# EAGLE board Qwiic_4_Pin_Fan_Controller (EAGLE 9.5.2)
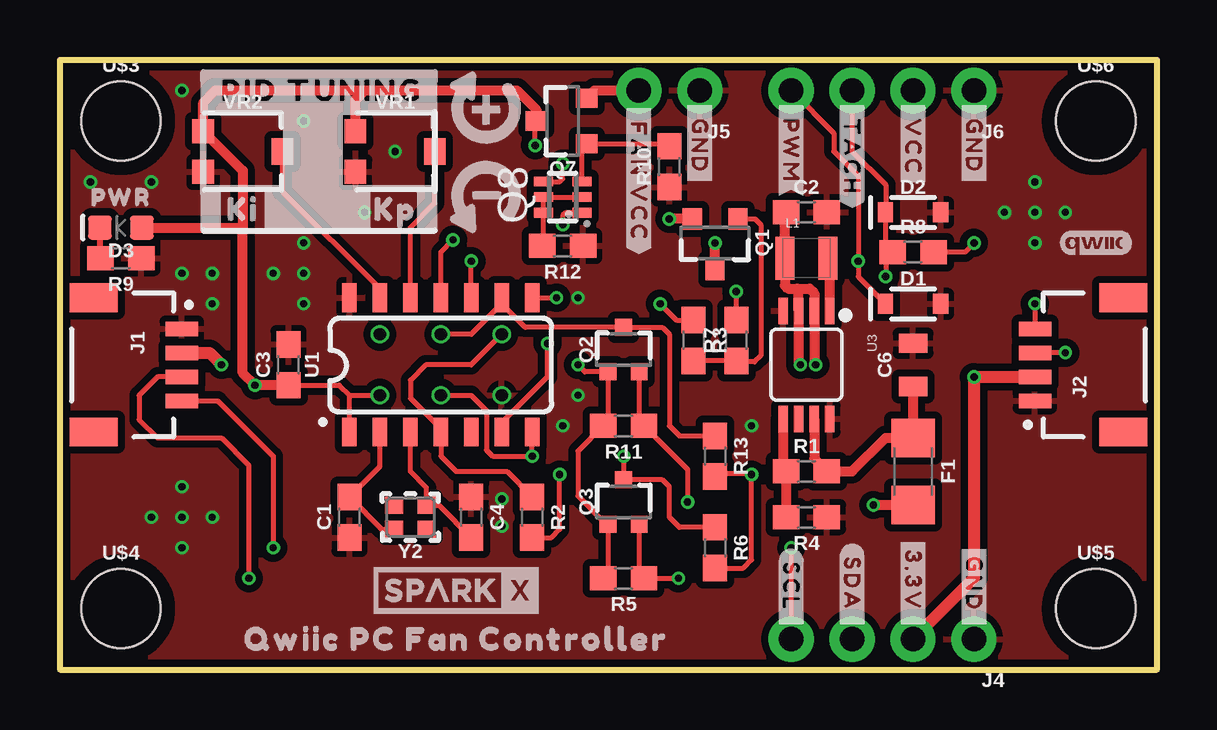
[diagram p0: board, top side]
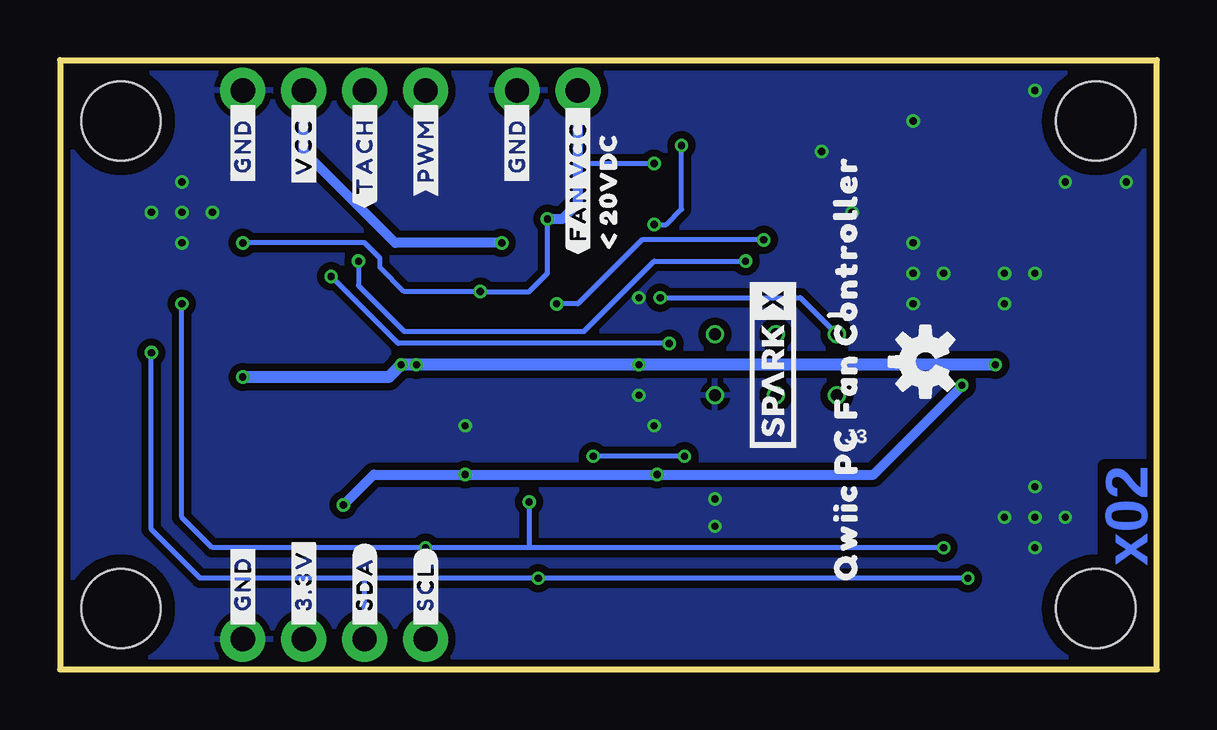
[diagram p1: board, bottom side, seen from below]

Size 45.72 x 25.4 mm. Coordinates in mm from the lower left corner, seen from the top.
Outline: 0,0 45.72,0 45.72,25.4 0,25.4 0,0
Copper layers (1*16): Top 0.035mm / dielectric 1.5mm / Bottom 0.035mm
Design rules "SparkFun-2-Layer-Minimum-JLCPCB": minimum track width 5mil, minimum drill 0.3mm, track to track 5mil, track to pad 5mil, pad to pad 5mil, via to via 5mil, smd to smd 5mil, copper to edge 7mil, drill to drill 7mil, minimum pad ring 5mil, minimum via ring 5mil, stop-mask expansion 4mil, vias tented up to drill 25mil, thermal gap 10mil
Net classes: 1 power: width 0.203 mm

## Footprints (pad centres in the part's own frame; a part is rotated, then mirrored left to right if it is on the bottom)
0603 = smd 1.1 x 1: 1 -0.85,0; 2 0.85,0
0805 = smd 0.8 x 1.2: 1 -0.9,0; 2 0.9,0
SOD-323 = smd 0.63 x 0.83: A 1.15,0; C -1.15,0
LED-0603 = smd 1 x 1: A -0.877,0; C 0.877,0
1206 = smd 1.6 x 1.8: 1 -1.4,0; 2 1.4,0
JST04_1MM_RA = smd 0.6 x 1.35: 1 -1.5,0; 2 -0.5,0; 3 0.5,0; 4 1.5,0 | smd 1.2 x 2: NC1 2.8,-3.675; NC2 -2.8,-3.675
2X3_TEST_POINTS = drill 0.508: 1 -2.54,-1.27; 2 -2.54,1.27; 3 0,-1.27; 4 0,1.27; 5 2.54,-1.27; 6 2.54,1.27
1X04_NO_SILK = drill 1.016 pad 1.88: 1 0,0; 2 2.54,0; 3 5.08,0; 4 7.62,0
1X02_NO_SILK = drill 1.016 pad 1.88: 1 0,0; 2 2.54,0
0806 = smd 0.8 x 1.8: 1 -0.9,0; 2 0.9,0
SOT23-3 = smd 0.8 x 0.9: 1 -0.95,-1; 2 0.95,-1; 3 0,1.1
SOT323 = smd 0.7 x 0.7: 1 -0.65,-0.925; 2 0.65,-0.925; 3 0,0.925
SOT363_PHILIPS = smd 0.4 x 0.8: 1 -0.65,-0.8; 2 0,-0.8; 3 0.65,-0.8; 4 0.65,0.8; 5 0,0.8; 6 -0.65,0.8
0603@1 = smd 1.1 x 1: 1 -0.85,0; 2 0.85,0
SO14 = smd 0.6 x 1.2: 1 -3.81,-2.8; 2 -2.54,-2.8; 3 -1.27,-2.8; 4 0,-2.8; 5 1.27,-2.8; 6 2.54,-2.8; 7 3.81,-2.8; 8 3.81,2.8; 9 2.54,2.8; 10 1.27,2.8; 11 0,2.8; 12 -1.27,2.8; 13 -2.54,2.8; 14 -3.81,2.8
MSOP8 = smd 0.4 x 1.1: 1 -0.975,-2.25; 2 -0.325,-2.25; 3 0.325,-2.25; 4 0.975,-2.25; 5 0.975,2.25; 6 0.325,2.25; 7 -0.325,2.25; 8 -0.975,2.25
STAND-OFF = hole 3.302: 0,0
TRIMPOT-SMD-3MM-CLOSED = smd 1 x 0.9: 1 -0.85,-1.65; 3 0.85,-1.65 | smd 1.1 x 0.9: 2 0,1.65
CRYSTAL-SMD-2.0X1.6MM = smd 0.75 x 0.7: 1 -0.675,-0.5; 2 0.675,-0.5; 3 0.675,0.5; 4 -0.675,0.5

## Placement (x,y rotation side)
C1  22pF  [0603]  12.06,6.35 90 top
C2  10uF  [0603]  31.11,19.05 0 top
C3  0.1uF  [0603]  9.53,12.7 90 top
C4  22pF  [0603]  17.14,6.35 270 top
C6  22uF  [0805]  35.56,12.7 90 top
D1  3.6V  [SOD-323]  35.56,15.24 0 top
D2  3.6V  [SOD-323]  35.56,19.05 0 top
D3  RED  [LED-0603]  2.54,18.41 180 top
F1  6V/0.75A  [1206]  35.56,8.26 270 top
FRAME1  FRAME-LETTER  [CREATIVE_COMMONS]  -1.27,-11.43 0 top  (outside the outline)
J1  QWIIC_RIGHT_ANGLE  [JST04_1MM_RA]  5.08,12.7 270 top
J2  QWIIC_RIGHT_ANGLE  [JST04_1MM_RA]  40.64,12.7 90 top
J3  AVR_SPI_PROG_3X2TESTPOINTS  [2X3_TEST_POINTS]  15.88,12.7 180 bottom
J4  [1X04_NO_SILK]  38.1,1.27 180 top
J5  [1X02_NO_SILK]  26.67,24.13 180 top
J6  [1X04_NO_SILK]  38.1,24.13 180 top
L1  2.2μH  [0806]  31.11,17.14 0 top
Q1  20V/4.2A/52mΩ/1.4W  [SOT23-3]  27.3,17.78 180 top
Q2  310mA/60V/1.6Ω  [SOT323]  23.5,13.34 0 top
Q3  310mA/60V/1.6Ω  [SOT323]  23.5,6.99 0 top
Q7  20V/4.2A/52mΩ/1.4W  [SOT23-3]  20.95,22.86 90 top
Q8  [SOT363_PHILIPS]  20.95,19.68 90 top
R1  750K  [0603]  31.11,8.26 0 top
R2  10k  [0603@1]  19.68,6.35 270 top
R3  1k  [0603]  26.42,13.72 270 top
R4  100k  [0603]  31.11,6.35 180 top
R5  2.2k  [0603]  23.5,3.81 180 top
R6  2.2k  [0603]  27.3,5.08 270 top
R7  10k  [0603@1]  28.19,13.72 90 top
R8  10k  [0603@1]  35.56,17.4 0 top
R9  1k  [0603]  2.54,17.14 180 top
R10  47k  [0603@1]  25.4,20.95 90 top
R11  2.2k  [0603]  23.5,10.16 180 top
R12  10k  [0603@1]  20.95,17.65 180 top
R13  2.2k  [0603]  27.3,8.89 270 top
U1  ATtiny841  [SO14]  15.88,12.7 0 top
U3  PAM2401  [MSOP8]  31.11,12.7 180 top
U$1  [#_GND#0]  38.1,23.75 270 top
U$2  [#_VCC#0]  35.56,23.75 270 top
U$3  [STAND-OFF]  2.54,22.86 0 top
U$4  [STAND-OFF]  2.54,2.54 0 top
U$5  [STAND-OFF]  43.18,2.54 0 top
U$6  [STAND-OFF]  43.18,22.86 0 top
U$7  [#_TACH#0]  33.02,23.75 270 top
U$8  [#_PWM#0]  30.48,23.75 270 top
U$9  [#_GND#0]  26.67,23.75 270 top
U$10  [#GND_#0]  38.1,1.65 270 top
U$11  [#3#3V_#0]  35.56,1.65 270 top
U$12  [#SDA_#0]  33.02,1.65 270 top
U$13  [#SCL_#0]  30.48,1.65 270 top
U$14  [#PID_TUNING0]  10.92,24.13 0 top
U$15  [KI0]  7.62,19.18 0 top
U$16  [KP0]  13.97,19.18 0 top
U$17  [QWIIC_3MM]  43.18,17.78 0 top
U$18  [SPARKX-SMALL]  16.51,3.3 0 top
U$19  [#_FAN_VCC#0]  24.13,23.62 270 top
U$20  [#GND_#0]  38.1,23.75 90 bottom
U$21  [#_GND#0]  38.1,1.65 90 bottom
U$22  [PWR0]  2.54,19.68 0 top
U$23  [#VCC_#0]  35.56,23.75 90 bottom
U$24  [#TACH_#0]  33.02,23.75 90 bottom
U$25  [#PWM_#0]  30.48,23.75 90 bottom
U$26  [#GND_#0]  26.67,23.75 90 bottom
U$27  [#_3#3V#0]  35.56,1.65 90 bottom
U$28  [#_SDA#0]  33.02,1.65 90 bottom
U$29  [#_SCL#0]  30.48,1.65 90 bottom
U$30  [QWIIC_PC_FAN_CONTROLLER0]  16.51,1.27 0 top
U$31  [#FAN_VCC_#0]  24.13,23.62 90 bottom
U$32  [_#_20VDC0]  22.86,22.86 90 bottom
U$35  [QWIIC_PC_FAN_CONTROLLER0]  12.95,12.57 90 bottom
U$36  [SPARKX-SMALL]  16,12.7 90 bottom
U$37  [OSHW-LOGO-S]  9.65,12.83 90 bottom
U$38  [TURN_INDICATOR#SVG0]  16.13,25.02 0 top
VR1  10k  [TRIMPOT-SMD-3MM-CLOSED]  13.97,21.59 270 top
VR2  10k  [TRIMPOT-SMD-3MM-CLOSED]  7.62,21.59 270 top
Y2  16MHz  [CRYSTAL-SMD-2.0X1.6MM]  14.61,6.35 180 top

## Library data of the parts
C1 C4 = SparkFun-Capacitors; PROD_ID: CAP-07876
C2 = SparkFun-Capacitors; PROD_ID: CAP-11015
C3 = SparkFun-Capacitors; PROD_ID: CAP-00810
C6 = SparkFun-Capacitors; PROD_ID: CAP-08402
D1 D2 = SparkFun-DiscreteSemi; PROD_ID: DIO-08199
D3 = SparkFun-LED; PROD_ID: DIO-00819
F1 = SparkFun-Fuses; PROD_ID: RES-11150
FRAME1 U$17 U$37 = SparkFun-Aesthetics
J1 J2 = SparkFun-Connectors; PROD_ID: CONN-13694
J3-J5 = SparkFun-Connectors
J6 = SparkFun-Connectors; PROD_ID: CONN-09696
L1 = SparkFun-Coils; PROD_ID: NDUC-14257
Q1 Q7 = SparkFun-DiscreteSemi; PROD_ID: TRAN-14388
Q2 Q3 = SparkFun-DiscreteSemi; PROD_ID: TRANS-11151
Q8 = SparkFun-DiscreteSemi; PROD_ID: TRAN-14386
R1 = SparkFun-Resistors; PROD_ID: RES-13768
R2 R7 R8 R12 = SparkFun-Resistors; PROD_ID: RES-00824
R3 R9 = SparkFun-Resistors; PROD_ID: RES-07856
R4 = SparkFun-Resistors; PROD_ID: RES-07828
R5 R6 R11 R13 = SparkFun-Resistors; PROD_ID: RES-08272
R10 = SparkFun-Resistors; PROD_ID: RES-07871
U1 = SparkFun-IC-Microcontroller; PROD_ID: IC-14692
U3 = SparkFun-IC-Power; PROD_ID: IC-13769
U$1 U$2 U$7-U$16 U$19-U$32 U$35 = output
U$3-U$6 = SparkFun-Hardware
U$18 U$36 = SparkX
U$38 = turn_indicators
VR1 VR2 = SparkFun-Resistors; PROD_ID: RES-09285
Y2 = SparkFun-Clocks; PROD_ID: XTAL-14681

## Nets
3.3V: C2.1 J1.2 J2.2 J4.2 L1.1 Q2.1 Q3.1 R5.2 R11.2 U3.2 U3.3
5V: C3.1 D3.A F1.2 J3.2 Q7.3 Q8.1 R2.2 R6.2 R13.2 U1.1 VR1.1 VR2.1
!FAN_EN: R3.1 U1.11
!RST: J3.5 R2.1 U1.4
CIPO: J3.1 U1.8
FAN_PWM: D1.C J6.4 U1.10
FAN_PWR: J6.2 Q1.3
FAN_TACH: D2.C J6.3 R8.1 U1.6
GND [power]: C1.1 C2.2 C3.2 C4.1 C6.2 D1.A D2.A J1.1 J2.1 J3.6 J4.1 J5.1 J6.1 R4.1 R9.1 R10.1 R12.1 U1.14 U3.4 U3.8 VR1.3 VR2.3
HV_SCL: J3.3 Q2.3 R13.1 U1.9
HV_SDA: J3.4 Q3.3 R6.1 U1.7
KI_TRIM: U1.13 VR2.2
KP_TRIM: U1.12 VR1.2
N$1: C4.2 U1.3 Y2.1
N$2: R1.1 R4.2 U3.5
N$3: L1.2 U3.1
N$4: C1.2 U1.2 Y2.3
N$5: Q1.1 R3.2 R7.1
N$6: C6.1 F1.1 R1.2 U3.7
N$7: D3.C R9.2
N$15: Q7.1 Q8.3 R10.2
N$16: Q8.2 Q8.5 Q8.6 R12.2
SCL: J1.4 J2.4 J4.4 Q2.2 R11.1
SDA: J1.3 J2.3 J4.3 Q3.2 R5.1
VCC_2: J5.2 Q1.2 Q7.2 Q8.4 R7.2 R8.2

## Tracks (layer width: path | path; a pad name or v marks a point on that pad's centre or on a via)
3.3V  (via drill 0.3)
  Top 0.203: 30.21,19 C2.1 | R5.2 22.84,4.01 Q3.1 22.77,6.06 21.59,7.24 21.59,9.11 R11.2 22.84,10.36 Q2.1 21.88,12.41 v21.59,12.7 | 30.79,15.82 30.73,15.88
  Top 0.406: 30.21,19 L1.1 30.21,16.01 30.35,15.88 30.73,15.88 31.24,15.88 31.44,15.68 U3.2 31.44,12.76 v31.5,12.7 | 30.79,15.82 U3.3 30.79,12.77 v30.86,12.7
  Top 0.508: J1.2 6.23,13.2 v6.73,12.7 | J2.2 v38.11,12.2 v38.1,12.19 38.1,3.81 J4.2
  Bottom 0.508: v6.73,12.7 v21.59,12.7 v30.86,12.7 v31.5,12.7 32,12.19 v38.1,12.19
5V  (via drill 0.3)
  Top 0.203: U1.1 12.06,11.43 | 12.06,11.43 J3.2 | C3.1 11.64,11.85 12.06,11.43 | R13.2 27.43,8.17 28.79,8.17 v28.83,8.13 28.83,4.57 28.49,4.23 R6.2 | R2.2 20.49,5.5 20.83,5.84 v20.83,8.13 | Q8.1 21.07,19.04 20.95,18.92 v20.95,18.54 | v19.81,21.84 19.81,22.82 Q7.3
  Top 0.406: 12.7,24.13 6.48,24.13 5.97,23.62 VR2.1 7.62,20.79 7.62,18.41 | VR1.1 12.32,23.75 12.7,24.13 | C3.1 v8.13,11.85 7.62,12.36 7.62,18.41 | F1.2 v33.91,6.86 | D3.A 7.62,18.41 | Q7.3 19.86,23.32 19.05,24.13 12.7,24.13
  Bottom 0.203: v20.95,18.54 20.45,18.54 19.81,19.18 v19.81,21.84
  Bottom 0.406: v33.91,6.86 32.64,8.13 v28.83,8.13 v20.83,8.13 11.81,8.13 8.13,11.81 v8.13,11.85
!FAN_EN  (via drill 0.3)
  Top 0.203: v16.38,17.91 15.88,17.4 U1.11 | v25.02,15.24 25.69,14.57 R3.1
  Bottom 0.203: v16.38,17.91 21.46,17.91 24.13,15.24 v25.02,15.24
!RST
  Top 0.203: R2.1 18.63,8.26 16.51,8.26 15.88,8.89 U1.4 15.88,10.03 14.61,11.3 14.61,12.06 15.24,12.7 17.14,12.7 J3.5
CIPO  (via drill 0.3)
  Top 0.203: U1.8 v20.7,15.5 v20.7,15.49
  Bottom 0.203: v20.7,15.49 14.86,15.49 J3.1
FAN_PWM  (via drill 0.3)
  Top 0.203: D1.C 33.27,16.38 v33.27,17.02 33.27,20.57 32.26,21.59 32.26,22.35 J6.4 | U1.10 v17.14,17.02
  Bottom 0.203: v33.27,17.02 33.27,16 31.37,14.1 23.88,14.1 20.95,17.02 v17.14,17.02
FAN_PWR  (via drill 0.3)
  Top 0.406: Q1.3 v27.3,17.78
  Bottom 0.406: v27.3,17.78 31.75,17.78 35.56,21.59 J6.2
FAN_TACH  (via drill 0.3)
  Top 0.203: J6.3 33.02,21.59 34.42,20.19 D2.C 34.41,17.7 R8.1 34.42,17.11 v34.42,16.38 | U1.6 18.41,10.29 20.32,12.19 v20.32,13.59
  Bottom 0.203: v20.32,13.59 31.62,13.59 v34.42,16.38
GND  (via drill 0.3)
  other vias: 18.41,7.11 18.41,5.97 10.16,17.78 10.16,16.51 10.16,15.24 13.97,21.59 12.7,19.05 1.27,20.32 8.89,16.51 3.81,20.32 5.08,6.35 5.08,5.08 5.08,7.62 6.35,6.35 3.81,6.35 21.59,11.43 20.95,10.16 28.83,10.16 40.64,19.05 41.91,19.05 39.37,19.05 40.64,20.32 40.64,17.78 21.59,15.49 6.35,15.24 6.35,16.51 5.08,16.51 5.08,24.13 10.16,22.86
  pour Top (isolate 0.305): 0,25.4 45.72,25.4 45.72,0 0,0
  pour Bottom (isolate 0.305): 0,25.4 45.72,25.4 45.72,0 0,0
HV_SCL
  Top 0.203: R13.1 25.82,9.74 25.4,10.16 25.4,13.97 25.11,14.26 Q2.3 19.39,14.26 18.41,15.24 | U1.9 18.41,15.24 | 18.41,15.24 17.14,13.97 J3.3
HV_SDA  (via drill 0.3)
  Top 0.203: R6.1 25.82,5.93 25.4,6.35 25.4,7.62 25.11,7.91 Q3.3 v23.5,8.89 | J3.4 17.14,11.43 17.78,10.79 17.78,9.14 18.03,8.89 v19.68,8.89 U1.7
  Bottom 0.203: v19.68,8.89 v23.5,8.89
KI_TRIM
  Top 0.203: VR2.2 9.27,19.94 13.34,15.88 U1.13
KP_TRIM
  Top 0.203: U1.12 14.61,18.41 15.62,19.43 VR1.2
N$1
  Top 0.203: C4.2 15.79,6.85 Y2.1 15.28,7.58 14.61,8.26 U1.3
N$2
  Top 0.203: 30.14,8.38 R1.1
  Top 0.406: U3.5 30.14,8.38 | R1.1 R4.2
N$3
  Top 0.406: U3.1 32.09,17.07 L1.2
N$4
  Top 0.203: Y2.3 13.41,5.85 C1.2 13.34,8.47 U1.2
N$5
  Top 0.203: R3.2 R7.1 28.23,12.83 28.96,12.83 29.21,13.08 29.21,18.54 28.97,18.78 Q1.1
N$6
  Top 0.406: U3.7 31.44,8.78 R1.2 33.02,8.26 34.42,9.65 F1.1 C6.1
N$7
  Top 0.254: D3.C 1.66,17.17 R9.2
N$15
  Top 0.203: Q8.3 21.75,21.71 Q7.1 25.3,21.91 R10.2
N$16
  Top 0.203: R12.2 20.16,17.7 Q8.6 Q8.5 Q8.2
SCL  (via drill 0.3)
  Top 0.203: Q2.2 24.14,10.36 R11.1 26.16,8.34 v26.16,6.99 | J1.4 6.58,11.2 8.89,8.89 v8.89,5.08 | J4.4 v30.48,5.08 | v40.64,15.24 J2.4
  Bottom 0.203: v8.89,5.08 26.16,5.08 | 26.16,5.08 v30.48,5.08 39.37,5.08 40.64,6.35 v40.64,15.24 | v26.16,6.99 26.16,5.08
SDA  (via drill 0.3)
  Top 0.203: Q3.2 24.14,4.01 R5.1 v25.78,3.81 | J1.3 4.07,12.2 3.3,11.43 3.3,10.41 4.06,9.65 6.73,9.65 7.87,8.51 v7.87,3.81 | v41.91,13.21 v41.9,13.2 J2.3
  Bottom 0.203: v7.87,3.81 v25.78,3.81 33.02,3.81 | 33.02,3.81 39.88,3.81 41.91,5.84 v41.91,13.21 | J4.3 33.02,3.81
VCC_2  (via drill 0.3)
  Top 0.203: R7.2 v28.19,15.75 | v38.1,17.78 37.72,17.4 R8.2 | Q8.4 20.84,20.34 20.95,20.45 v20.95,21.08
  Top 0.406: Q7.2 22.27,24.13 J5.2 | Q1.2 v25.4,18.78
  Bottom 0.203: v38.1,17.78 33.02,17.78 32.38,17.14 32.38,16.76 31.37,15.75 v28.19,15.75 26.16,15.75 25.4,16.51 v25.4,18.78 | v20.95,21.08 24.13,21.08
  Bottom 0.406: v25.4,18.78 24.78,18.78 24.13,19.43 24.13,21.08 J5.2

## Text on the board
Bottom: x02